# Altium PCB Sonar.PcbDoc
Units mm, origin at the board's own origin, x right, y up, seen from the top; angles counter-clockwise.
Board outline 29.5 x 29.5 mm, 4 copper layers (Top Layer, MidLayer1, GroundPlane, Bottom Layer); 16 components, 18 nets, 106 pads, 20 vias.
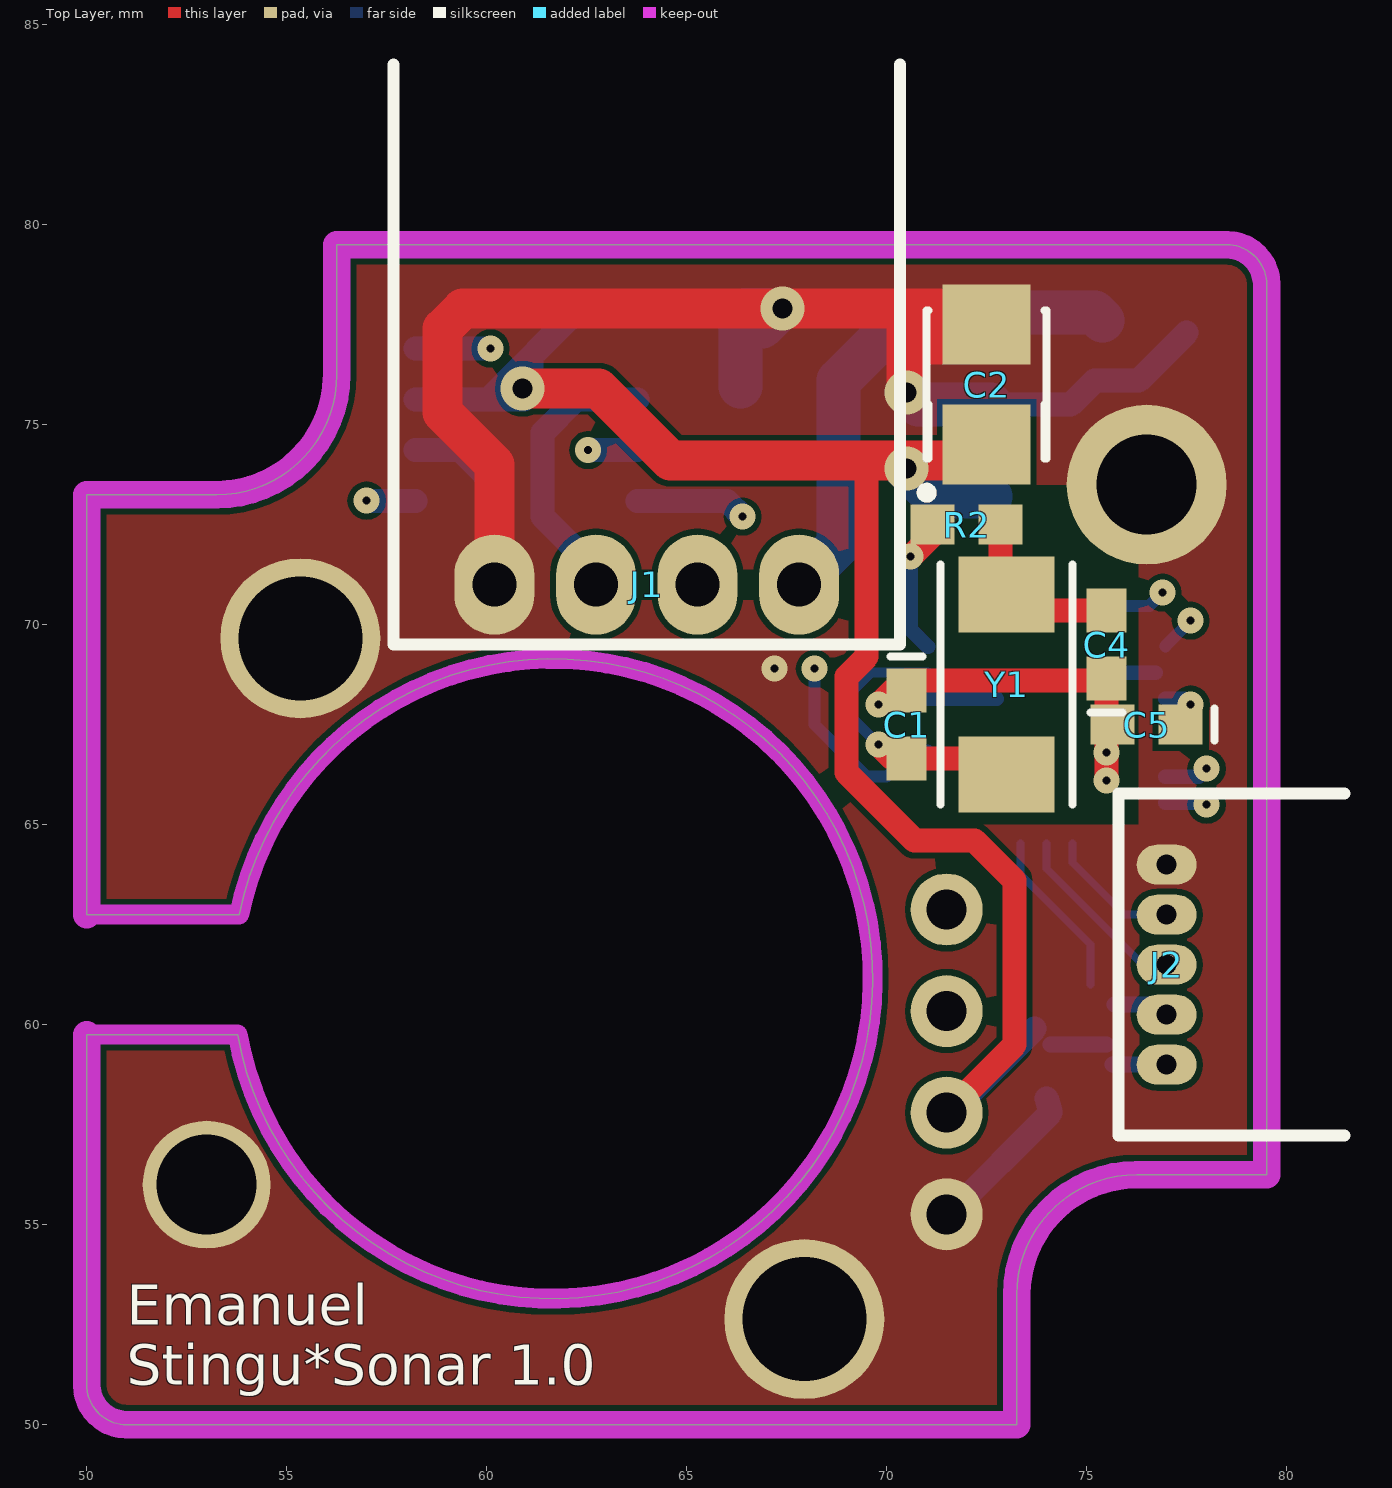
[diagram p0: Top Layer view]
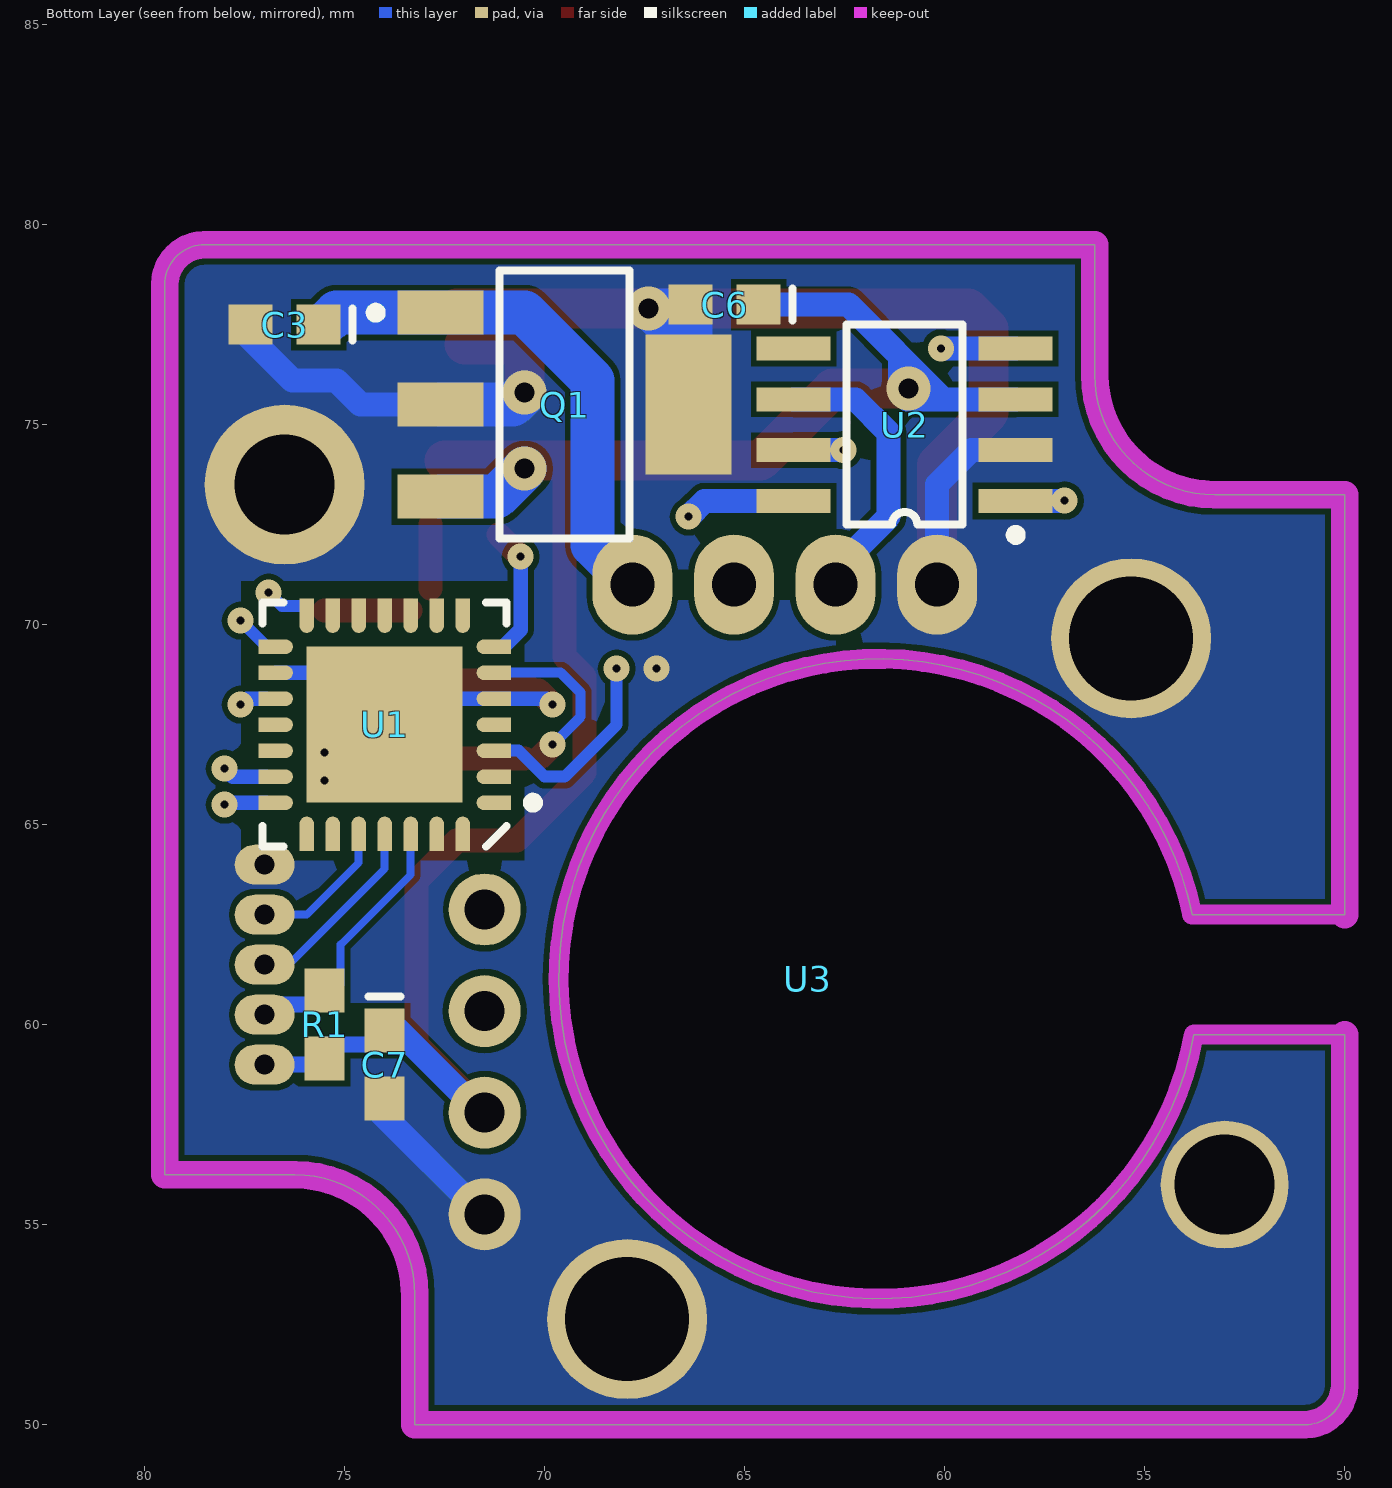
[diagram p1: Bottom Layer view, seen from below]
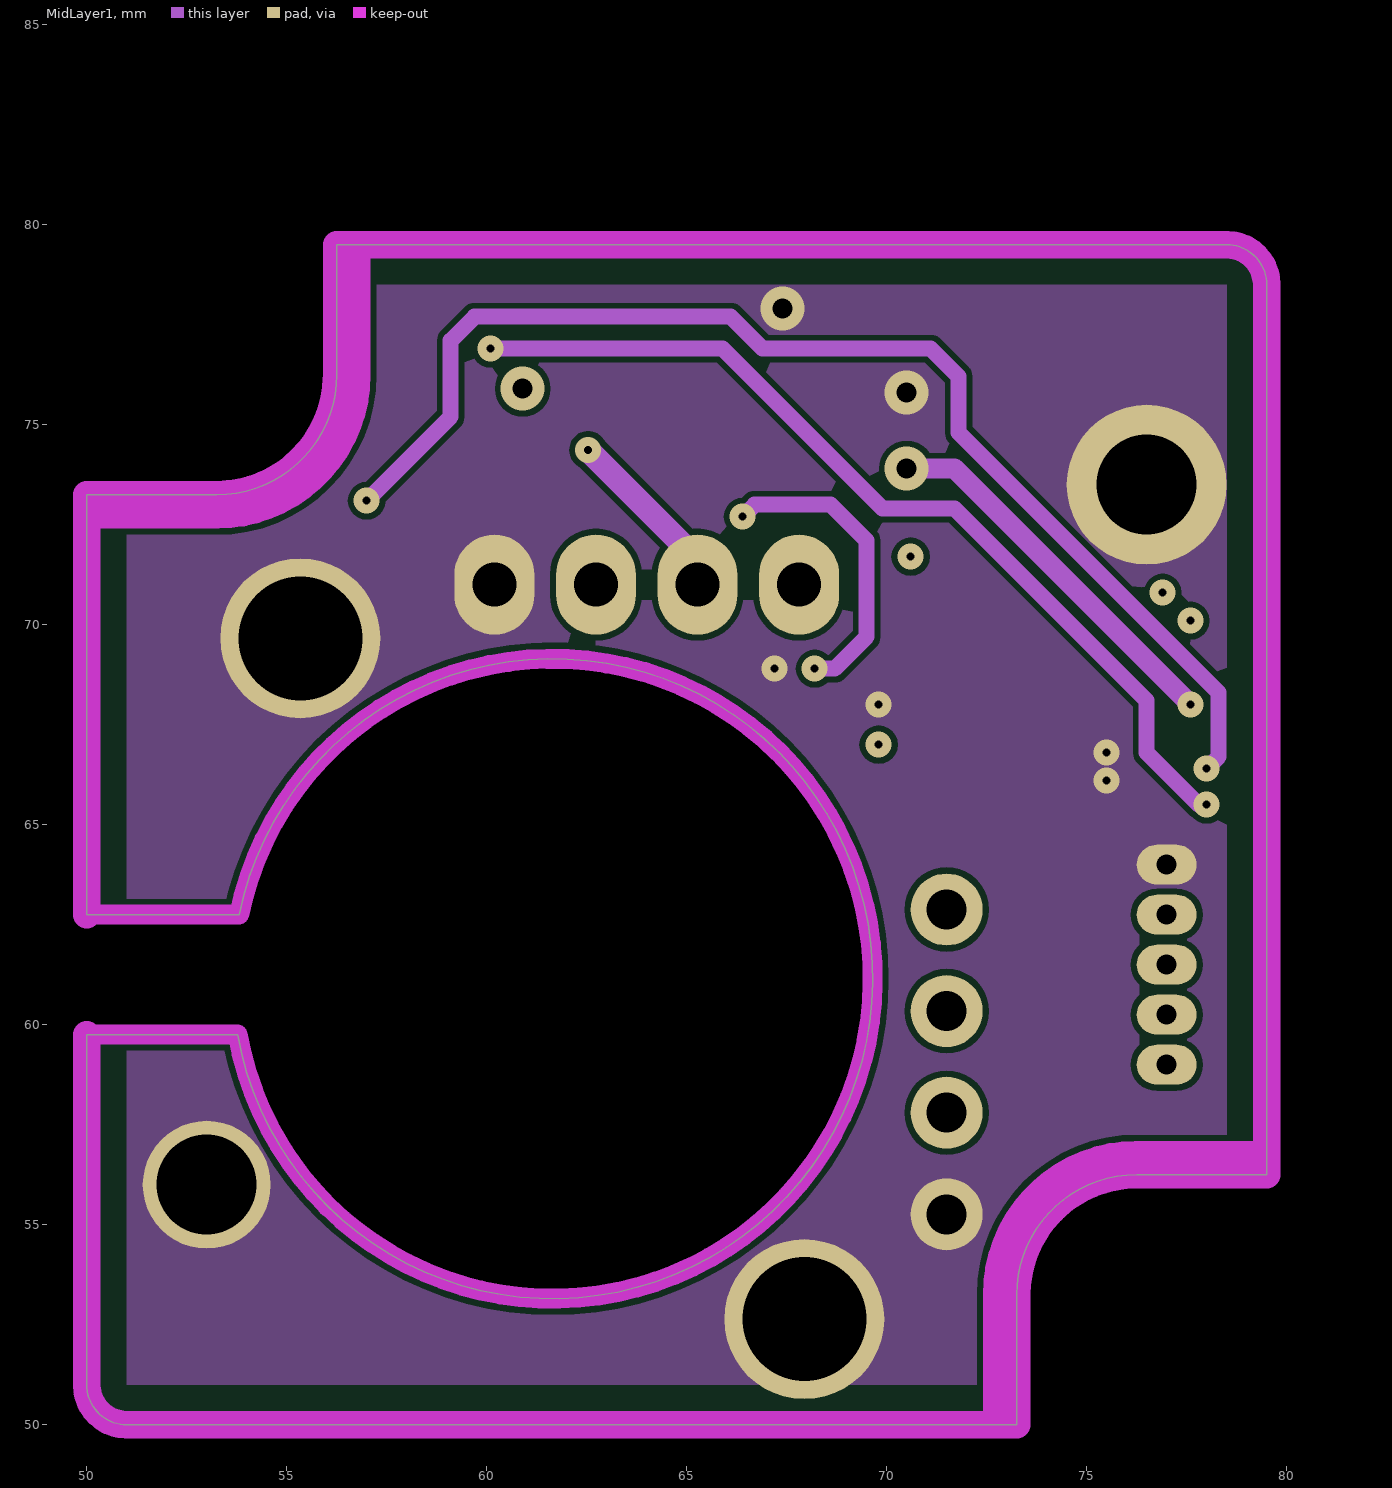
[diagram p2: MidLayer1]
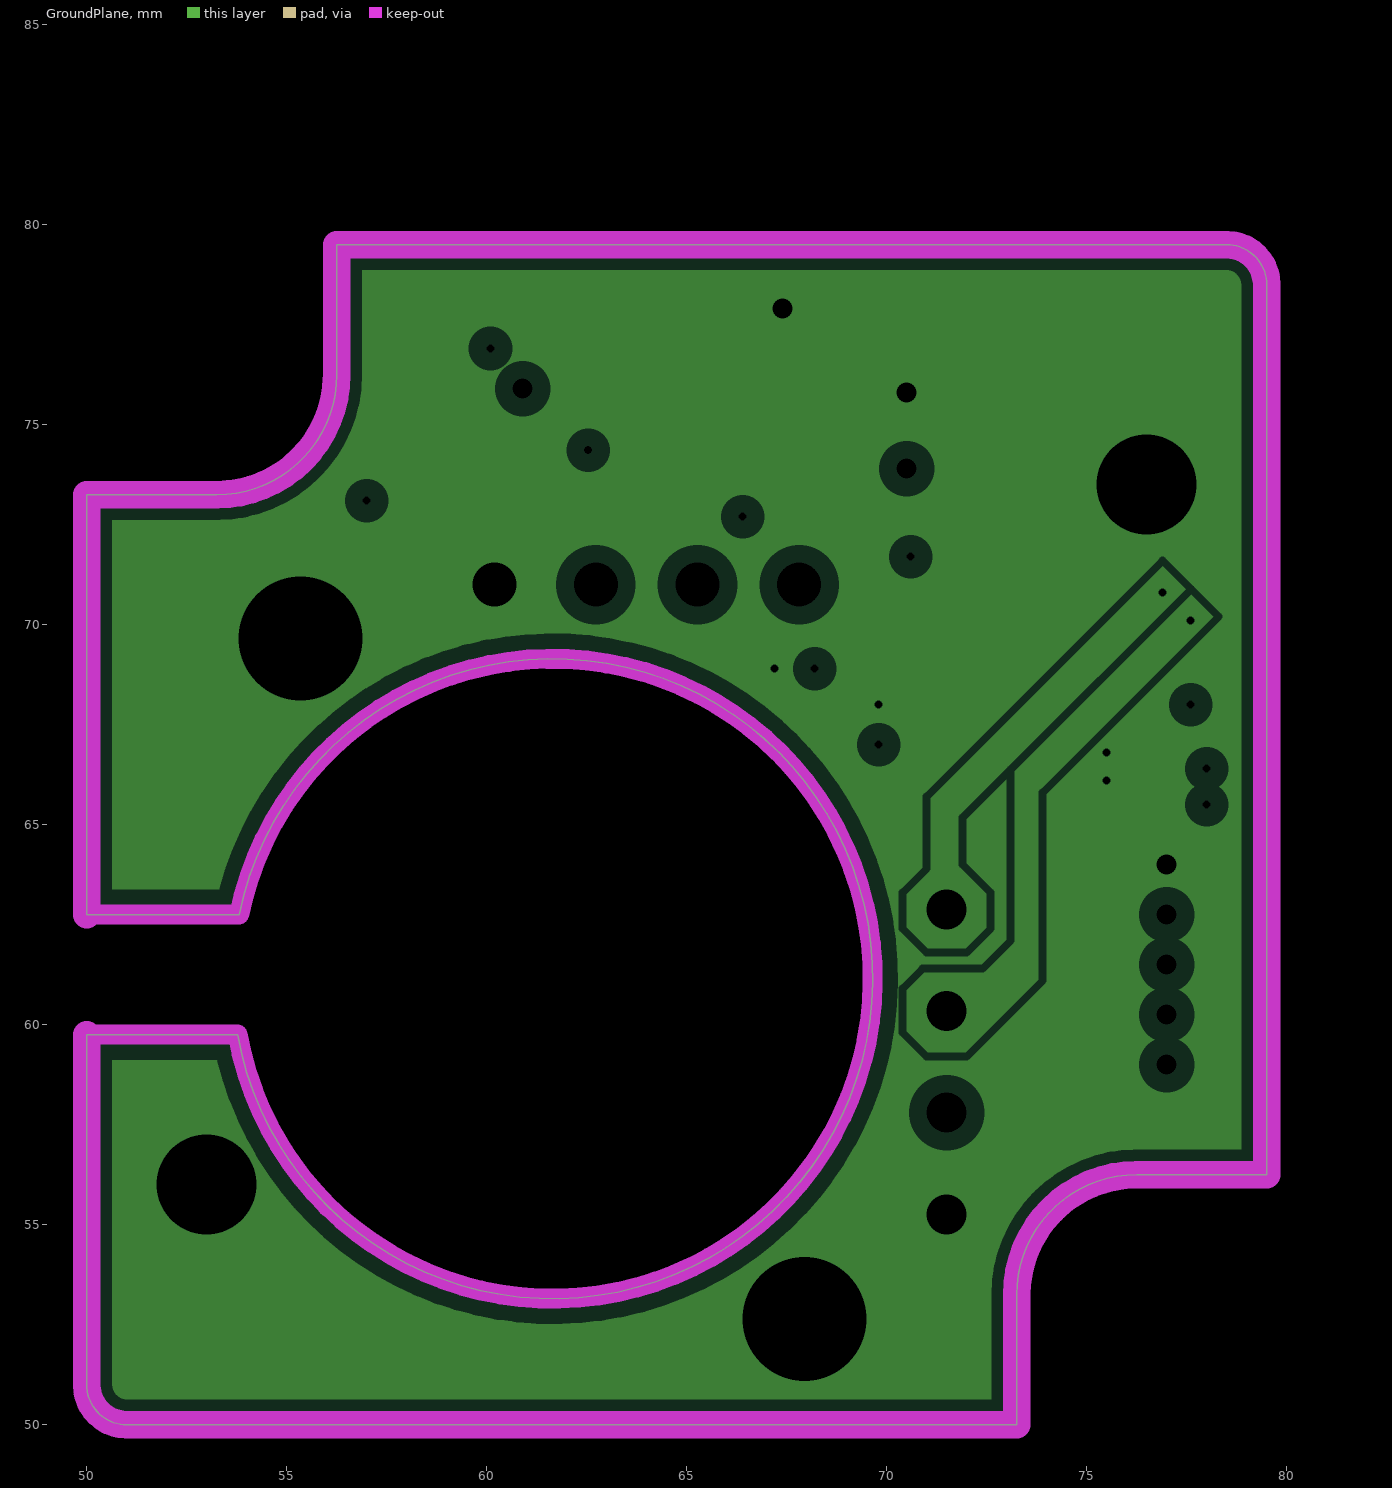
[diagram p3: GroundPlane, clearances drawn from the general rule]

## Layer stack, top to bottom
Top Layer: signal copper 0.036
Dielectric: prepreg 0.32, FR-4, Dk 4.8
MidLayer1: signal copper 0.036
Dielectric: core 0.32, FR-4, Dk 4.8
GroundPlane: plane copper 0.036, net GND
Dielectric: prepreg 0.32, FR-4, Dk 4.8
Bottom Layer: signal copper 0.036

## Board outline
51,50 cw(c51,51) 50,51 50,59.75 53.773,59.75 ccw(c61.65,61.15) 53.812,62.752 53.812,62.75 50,62.75 50,73.25 53.25,73.25 ccw(c53.25,76.25) 56.25,76.25 56.25,79.5 78.5,79.5 cw(c78.5,78.5) 79.5,78.5 79.5,56.25 76.25,56.25 ccw(c76.25,53.25) 73.25,53.25 73.25,50

## Design rules (kind name [scope] priority, off if disabled: settings)
Clearance [All] p1: gap=0.152
ComponentClearance [All] p1 off: gap=0.254 collisioncheckmode=3 verticalgap=0.254
HoleSize [All] p1: absolutevalues=TRUE maxlimit=4 minlimit=0.2 maxpercent=80.000 minpercent=20.000
PlaneClearance [All] p1: clearance=0.445
PlaneConnect [All] p1: planeconnectstyle=Direct reliefexpansion=0.508 reliefentries=4 reliefconductorwidth=0.254 reliefairgap=0.254
PolygonConnect [All] p1: connectstyle=Direct reliefconductorwidth=0.254 reliefentries=4 polygonreliefangle="90 Angle"
RoutingVias [All] p1: holewidth=0.2 width=0.65 viastyle="Through Hole" minholewidth=0.2 minwidth=0.65 maxholewidth=1.5 maxwidth=2.1
ShortCircuit ShortCircuit_Unconnected_Pins [IsPad and not InnetClass('All') vs IsPad and not InnetClass('All')] p1: allowed=TRUE
ShortCircuit [All] p2: allowed=FALSE
SolderMaskExpansion [All] p1: expansion=0.075
TestPointUsage [All] p1: valid=0 allowmultiple=FALSE
Testpoint [All] p1: side=15 testpointundercomponent=TRUE minsize=1.016 maxsize=2.54 preferedsize=1.524 minholesize=0 maxholesize=1.016 preferedholesize=0.813 testpointgrid=0.025 style=1023 order=0123456789
Width [All] p1: maxlimit=3 minlimit=0.152 preferedwidth=0.3 minimp=50.000000 maximp=50.000000 favimp=50.000000
14 further rules are at their usual default settings.

## Components (designator, comment, footprint, x,y, rotation, side; value= is the part's Value field where it differs from the comment)
C1 "Cap" CC1608-0603 70.5,67.5 r270 top
C2 "TPSB106K016R0800" TC3528-1411 72.5,76 r90 top
C3 "UMK107BJ104KA-T" CC1608-0603 76.5,77.5 r0 bottom
C4 "Cap" CC1608-0603 75.5,69.5 r90 top
C5 "UMK107BJ104KA-T" CC1608-0603 76.5,67.5 r180 top
C6 "UMK107BJ104KA-T" CC1608-0603 65.5,78 r0 bottom
C7 "UMK107BJ104KA-T" CC1608-0603 74,59 r270 bottom
J1 "70553-0003" CON_CAN_Device-4 64,71 r180 top
J2 "53048-0510" CON_ISP_H 77,61.5 r90 top
Q1 "MIC5201-5.0YS" DSO-G3 69.5,75.5 r270 bottom
R1 "Res" CR1608-0603 75.5,60 r270 bottom
R2 "Res" CR1608-0603 72,72.5 r0 top
U1 "PIC18F2580-I/ML" QFN6X6-28 74,67.5 r90 bottom
U2 "TJA1040TD-T" SO-G8/E2.9 61,75 r90 bottom
U3 "LV-MaxSonar-LX1" MAXSONAR 71.5,70.5 r90 bottom
Y1 "CS10-16.000MABJ-UT" CS10 73,68.5 r90 top

## Footprints (in the part's own frame and the unit in brackets; to place one, negate y for a bottom-side part, rotate by r counter-clockwise, add the part's x,y. Pads: shape width x height; smd on the part's side, far side on the other; paste and mask are expansions set on the pad)
CC1608-0603 [mm] "Chip Capacitor; Body 1.6 x 0.8 mm (LxW typ)"
  rect 1.1x1 smd: 1(-0.85,0) 2(0.85,0)
  silkscreen extent -1.7,-0.4 -1.7,0.4
CON_CAN_Device-4 [mm] "4-pin CAN connector - device side"
  oval 2x2.5 hole 1.1: 1(-3.81,0) 2(-1.27,0) 3(1.27,0) 4(3.81,0)
  silkscreen extent -6.33,-13 6.33,1.5
CON_ISP_H [mm] "Microchip ISP Connector horizontal"
  oval 1x1.5 hole 0.5: 1(-2.5,0) 2(-1.25,0) 3(0,0) 4(1.25,0) 5(2.5,0)
  silkscreen extent -4.28,-4.45 4.28,1.2
CR1608-0603 [mm] "Chip Resistor; Body 1.6 x 0.8 mm (LxW typ)"
  rect 1.1x1 smd: 1(-0.85,0) 2(0.85,0)
CS10 [mm] "Crystal"
  rect 1.9x2.4 smd: 1(-2.25,0) 2(2.25,0)
  silkscreen extent -3,-1.65 3,1.65
DSO-G3 [mm] "SOT-223/SC-73; 4 Leads; Body 6.7 x 7.3 mm, inc. leads (LxW max)"
  rect 1.1x2.15 smd: 1(-2.3,-3.1) 2(0,-3.1) 3(2.3,-3.1)
  rect 3.5x2.15 smd: 4(0,3.1)
  silkscreen extent -3.35,-4.85 3.35,1.63
MAXSONAR [mm] "MaxSonar Module"
  round 4 hole 3.1: 0(-17.86,-3.56) 0(-0.84,-16.16)
  round 1.8 hole 1: 4(-7.62,0) 5(-10.16,0) 6(-12.7,0) 7(-15.24,0)
QFN6X6-28 [mm] "Quad Flat No Lead, Plastic, Punch; 28 Terminals; Body 6 x 6 mm; Pitch 0.65 mm"
  rect 0.37x0.37 smd: 1(-1.95,-2.97) 2(-1.3,-2.97) 3(-0.65,-2.97) 4(0,-2.97) 5(0.65,-2.97) 6(1.3,-2.97) 7(1.95,-2.97) 8(2.97,-1.95) 9(2.97,-1.3) 10(2.97,-0.65) 11(2.97,0) 12(2.97,0.65) 13(2.97,1.3) 14(2.97,1.95) 15(1.95,2.97) 16(1.3,2.97) 17(0.65,2.97) 18(0,2.97) 19(-0.65,2.97) 20(-1.3,2.97) 21(-1.95,2.97) 22(-2.97,1.95) 23(-2.97,1.3) 24(-2.97,0.65) 25(-2.97,0) 26(-2.97,-0.65) 27(-2.97,-1.3) 28(-2.97,-1.95)
  oval 0.37x0.86 smd: 1(-1.95,-2.725) 2(-1.3,-2.725) 3(-0.65,-2.725) 4(0,-2.725) 5(0.65,-2.725) 6(1.3,-2.725) 7(1.95,-2.725) 15(1.95,2.725) 16(1.3,2.725) 17(0.65,2.725) 18(0,2.725) 19(-0.65,2.725) 20(-1.3,2.725) 21(-1.95,2.725)
  oval 0.86x0.37 smd: 8(2.725,-1.95) 9(2.725,-1.3) 10(2.725,-0.65) 11(2.725,0) 12(2.725,0.65) 13(2.725,1.3) 14(2.725,1.95) 22(-2.725,1.95) 23(-2.725,1.3) 24(-2.725,0.65) 25(-2.725,0) 26(-2.725,-0.65) 27(-2.725,-1.3) 28(-2.725,-1.95)
  rect 3.9x3.9 smd: 29(0,0)
  silkscreen extent -3.05,-3.83 3.05,3.05
SO-G8/E2.9 [mm] "Small Outline; 8 Leads; Body Width 3.9 mm; Pitch 1.27 mm"
  rect 0.6x1.85 smd: 1(-1.905,-2.775) 2(-0.635,-2.775) 3(0.635,-2.775) 4(1.905,-2.775) 5(1.905,2.775) 6(0.635,2.775) 7(-0.635,2.775) 8(-1.905,2.775)
  silkscreen extent -2.88,-2.9 2.5,1.45
TC3528-1411 [mm] "Capacitor, SM Tantalum; Body 3.5 x 2.8 mm (LxW typ)"
  rect 2x2.2 smd: 1(-1.5,0) 2(1.5,0)
  silkscreen extent -2.82,-1.5 1.85,1.62

## Part data
C1 C4: "Capacitor"
C2: library part "Cap Pol", "Polarized Capacitor (Surface Mount)"
C3 C5 C6 C7: library part Cap, "Capacitor"
J1: library part CON_CAN_DEVICE, "4 pin CAN Connector 2.54mm pitch"
J2: library part CON_ISP_Header_5p_1.25mm_horizontal, "6 pin header - 1.25mm pitch horizontal"
Q1: "5V LDO 200mA"
R1 R2: "Resistor"
U1: "8 bit CAN MCU"
U2: "5V CAN Transceiver"
U3: library part MaxSonar_LX1, "Maxbotix ultrasound range sensor"
Y1: library part CS10, "Crystal Oscillator"

## Free pads (board coordinates)
  round 3.2 hole 2.5: 0(53,56)
  round 4 hole 2.5: 0(76.5,73.5)

## Via types
v1: diameter 0.65, hole 0.2, Top Layer to Bottom Layer, tented both sides, 11 vias
v2: diameter 1.1, hole 0.5, Top Layer to Bottom Layer, 3 vias
v3: diameter 0.65, hole 0.2, Top Layer to Bottom Layer, tented bottom, 3 vias
v4: diameter 1.1, hole 0.5, Top Layer to Bottom Layer, tented both sides, 1 vias
v5: diameter 0.65, hole 0.2, Top Layer to Bottom Layer, 1 vias
v6: diameter 0.65, hole 0.2, Top Layer to Bottom Layer, tented top, 1 vias

## Nets (pads, with @x,y where several pads share a name; then routed paths per layer and width w, separated by ;. In a path a pad name is that pad's centre, name@x,y a point inside that pad or via, vN(x,y) a via of type N, cw(c..) or ccw(c..) an arc to the next point about the centre after c; other vN are vias at no path point)
C\A\N\_\E\N\: U1.3 U2.8 | length 15.5
  MidLayer1 w0.4: v1(66.4,72.7) 66.7,73 68.6,73 69.5,72.1 69.5,69.7 68.7,68.9 v1(68.2,68.9)
  Bottom Layer w0.3: v1(68.2,68.9) 68.2,67.5 69.5,66.2 70,66.2 70.65,66.85 U1.3@71.03,66.85
  Bottom Layer w0.6: U2.8 66.005,73.095 v1(66.4,72.7)
CAN_RX: U1.21 U2.4 | length 26.3
  MidLayer1 w0.4: v1(60.095,76.905) 65.895,76.905 69.9,72.9 71.7,72.9 76.5,68.1 76.5,66.8 77.8,65.5 v1(78,65.5)
  Bottom Layer w0.37: U1.21@76.97,65.55 77.85,65.55 v1(78,65.5)
  Bottom Layer w0.6: U2.4 v1(60.095,76.905)
CAN_TX: U1.20 U2.1 | length 33.4
  MidLayer1 w0.4: v1(57,73.1) 59.1,75.2 59.1,77.1 59.7,77.7 66.1,77.7 66.9,76.9 71.1,76.9 71.8,76.2 71.8,74.8 78.3,68.3 78.3,66.7 v1(78,66.4)
  Bottom Layer w0.37: U1.20@76.97,66.2 77.8,66.2 v1(78,66.4)
  Bottom Layer w0.6: v1@57.005,73.095 U2.1
GND: C1.1 C2.2 C3.2 C4.1 C5.2 C6.2 C7.2 J1.4 J2.5 pad.0 Q1.2 Q1.4 U1.5 U1.16 U1.29 U2.2 U3.0 U3.7 | length 56.3
  Top Layer w0.6: v3(69.8,68) C1.1@70.15,68.35 ; C1.1@70.5,68.6 C4.1@75.45,68.6 ; v6(75.5,66.1) v5(75.5,66.8) 75.5,67.6 C4.1
  Top Layer w1: J1.4 60.19,74.01 58.9,75.3 58.9,77.4 59.4,77.9 v2(67.4,77.9) C2.2@72.2,77.9 ; v2(70.5,75.8) 70.5,77.8 ; 70.5,77 C2.2@72,77
  Bottom Layer w0.37: v3(69.8,68) 69.95,68.15 71.275,68.15 U1.29@72.75,68.15 ; U1.29@75.4,68.8 U1.16@76.725,68.8
  Bottom Layer w0.6: U2.2 59.335,74.365 60.19,73.51 J1.4 ; U3.7@71.56,55.26 74.1,57.8 C7.2 ; Q1.2 74.6,75.5 75.2,76.1 76.3,76.1 C3.2@77.5,77.3
  Bottom Layer w1: C6.2@66.45,77.9 v2(67.4,77.9) 66.9,77.4
  Bottom Layer w1.1: Q1.4@66.35,75.95 C6.2@66.35,77.7 ; v2(70.5,75.8) 70.8,75.5 Q1.2
  other v1: 67.2,68.9
LED_GREEN: U1.22
LED_RED: U1.23
M\C\L\R\: J2.2 R1.1 U1.26 | length 5.6
  Bottom Layer w0.2: U1.26@73.35,64.53 73.35,63.75 75.1,62 R1.1@75.1,61
  Bottom Layer w0.4: R1.1@75.7,60.5 J2.2@77,60.5
NetC1_2: C1.2 U1.6 Y1.1 | length 6.2
  Top Layer w0.6: v3(69.8,67) C1.2@70.15,66.65 ; C1.2 Y1.1@72.45,66.65
  Bottom Layer w0.25: v3(69.8,67) 69.1,67.7 69.1,68.3 69.6,68.8 U1.6@71.03,68.8
NetC3_1: C3.1 J1.1 Q1.1 | length 12.9
  Bottom Layer w1.1: J1.1 68.8,71.99 68.8,76.1 70.5,77.8 75.2,77.8 C3.1@75.4,77.6
NetC4_2: C4.2 R2.2 Y1.2 | length 3.8
  Top Layer w0.6: Y1.2@72.85,70.9 R2.2 ; Y1.2@73.35,70.35 C4.2
NetJ1_2: J1.2 U2.7 | length 5.7
  MidLayer1 w0.6: v1(62.535,74.365) 65.27,71.63 J1.2
  Bottom Layer w0.6: v1(62.535,74.365) U2.7
NetJ1_3: J1.3 U2.6 | length 6.7
  Bottom Layer w0.6: J1.3@62.7,71.4 61.4,72.7 61.4,74.8 62.235,75.635 U2.6
NetR2_1: R2.1 U1.7 | length 3.2
  Top Layer w0.6: v1(70.6,71.7) R2.1@71.15,72.25
  Bottom Layer w0.37: v1(70.6,71.7) 70.6,69.88 U1.7@71.03,69.45
NetU1_14: U1.14 U3.4 | length 1.1
  Bottom Layer w0.3: U1.14@75.95,70.47 76.57,70.47 v1(76.9,70.8)
NetU1_15: U1.15 U3.5 | length 0.9
  Bottom Layer w0.3: U1.15@76.97,69.45 76.97,69.47 v1(77.6,70.1)
PGC: J2.4 U1.24 | length 3.4
  Bottom Layer w0.2: U1.24@74.65,64.53 74.65,64.05 75.95,62.75 J2.4
PGD: J2.3 U1.25 | length 4
  Bottom Layer w0.2: U1.25@74,64.53 74,63.9 J2.3@76.4,61.5
VCC5V: C2.1 C5.1 C6.1 C7.1 J2.1 Q1.3 R1.2 U1.17 U2.3 U3.6 | length 60
  Top Layer w0.6: 69.5,74.1 69.5,69.2 69,68.7 69,66.3 70.7,64.6 72.2,64.6 73.2,63.6 73.2,59.5 U3.6
  Top Layer w1: v4(60.9,75.9) 62.8,75.9 64.6,74.1 C2.1@72.5,74.1 ; v2(70.5,73.9) v2@70.7,74.1
  MidLayer1 w0.5: v2(70.5,73.9) 71.7,73.9 v3(77.6,68)
  Bottom Layer w0.37: U1.17@76.97,68.15 77.45,68.15 v3(77.6,68)
  Bottom Layer w0.4: C7.1@74.1,59.5 R1.2@75.5,59.5 ; R1.2@75.65,59 J2.1
  Bottom Layer w0.6: U2.3 60.035,75.635 ; v4@60.935,75.635 60.035,75.635 ; v4@61.117,75.883 61.117,76.717 ; C6.1 62.4,78 60.035,75.635 ; U3.6 71.6,57.8 C7.1@73.7,59.9
  Bottom Layer w1.1: v2(70.5,73.9) 71.2,73.2 Q1.3
pads on no net: U1.1 U1.2 U1.4 U1.8 U1.9 U1.10 U1.11 U1.12 U1.13 U1.18 U1.19 U1.27 U1.28 U2.5

## Polygon pours and split planes (outlines as drawn)
GND on Top Layer "Top Layer-GND 1" (solid, remove dead copper, pour order 1001): 50,60.005 50,50 72.9,50 72.9,53.4 75.75,56.25 79.5,56.25 79.5,65 70,65 69,66 69,68.6 69.4,69 69.4,73.5 79.5,73.5 79.5,79 79,79.5 56.5,79.5 56.5,75.1 54.6,73.2 50,73.2
GND on Top Layer "Top Layer-GND" (solid, remove dead copper, pour order 1000): 79.5,74.1 76.3,74.1 76.3,64.5 79.5,64.5
GND on MidLayer1 "MidLayer1-GND" (solid, remove dead copper, pour order 1002): 78.5,78.5 78.5,56.5 75,56.5 73,54.5 73,51 51,51 51,73 54.5,73 56.5,75 56.5,78.5
GND on Bottom Layer "Bottom Layer-GND" (solid, remove dead copper, pour order 1003): 56.3,79.4 78.8,79.4 79.5,78.7 79.5,71.1 70.5,71.1 70.5,64.1 79.5,64.1 79.5,56.3 75,56.3 73.1,54.4 73.1,50 50.8,50 49.9,50.9 49.9,73.2 54,73.2 54.9,74.1 56.3,75.5
GND on Bottom Layer "Bottom Layer-GND 1" (solid, remove dead copper, pour order 1004): 79.5,72 77.6,72 77.6,63.7 79.5,63.7
GND on GroundPlane (split plane): 78.637,78.832 78.754,78.754 78.832,78.637 78.856,78.517 78.853,78.5 78.853,56.897 76.25,56.897 76.24,56.895 75.68,56.851 75.123,56.718 74.595,56.499 74.107,56.2 73.672,55.828 73.3,55.393 73.001,54.905 72.782,54.377 72.649,53.82 72.605,53.26 72.603,53.25 72.603,50.647 51,50.647 50.983,50.644 50.863,50.668 50.746,50.746 50.668,50.863 50.644,50.983 50.647,51 50.647,59.103 53.261,59.103 53.377,58.64 53.663,57.842 54.025,57.075 54.462,56.347 54.967,55.665 55.537,55.037 56.165,54.467 56.847,53.962 57.575,53.525 58.342,53.163 59.14,52.877 59.963,52.671 60.803,52.546 61.65,52.505 62.497,52.546 63.337,52.671 64.16,52.877 64.958,53.163 65.725,53.525 66.453,53.962 67.135,54.467 67.763,55.037 68.333,55.665 68.838,56.347 69.275,57.075 69.637,57.842 69.923,58.64 70.129,59.463 70.254,60.303 70.295,61.15 70.254,61.997 70.129,62.837 69.923,63.66 69.637,64.458 69.275,65.225 68.838,65.953 68.333,66.635 67.763,67.263 67.135,67.833 66.453,68.338 65.725,68.775 64.958,69.137 64.16,69.423 63.337,69.629 62.497,69.754 61.65,69.795 60.803,69.754 59.963,69.629 59.14,69.423 58.342,69.137 57.575,68.775 56.847,68.338 56.165,67.833 55.537,67.263 54.967,66.635 54.462,65.953 54.025,65.225 53.663,64.458 53.377,63.66 53.311,63.397 50.647,63.397 50.647,72.603 53.25,72.603 53.26,72.605 53.82,72.649 54.377,72.782 54.905,73.001 55.393,73.3 55.828,73.672 56.2,74.107 56.499,74.595 56.718,75.123 56.851,75.68 56.895,76.24 56.897,76.25 56.897,78.853 78.5,78.853 78.517,78.856
NetU1_15 on GroundPlane (split plane): 78.147,70.2 73.823,65.877 73.792,65.8 73.792,61.145 71.955,59.308 71.045,59.308 70.508,59.845 70.508,60.855 70.945,61.292 72.4,61.292 72.477,61.323 73.177,62.023 73.186,62.046 73.208,62.1 73.208,66.333 77.611,70.736
NetU1_14 on GroundPlane (split plane): 77.458,70.889 73.023,66.455 71.823,65.255 71.792,65.178 71.792,64 71.823,63.923 72.492,63.255 72.492,62.445 71.955,61.908 71.045,61.908 70.508,62.445 70.508,63.255 71.077,63.823 71.108,63.9 71.108,65.655 76.9,71.447

## Keep-outs
MidLayer1:
  lines w0.696: 50,72.75 53.25,72.75 ccw(c53.25,76.25) 56.75,76.25 56.75,79.5 ; 72.75,50 72.75,53.25 cw(c76.25,53.25) 76.25,56.75 79.5,56.75
Keep-Out Layer:
  lines w0.5: 50,59.75 53.773,59.75 ccw(c61.65,61.15) 53.812,62.752 ; 50,62.75 53.812,62.75
  lines w0.696: 50,59.75 50,51 ccw(c51,51) 51,50 73.25,50 73.25,53.25 cw(c76.25,53.25) 76.25,56.25 79.5,56.25 79.5,78.5 ccw(c78.5,78.5) 78.5,79.5 56.25,79.5 56.25,76.25 cw(c53.25,76.25) 53.25,73.25 50,73.25 50,62.75

## Other copper
GroundPlane (plane layer: these items are gaps in the copper):
  lines w0.2: 77.611,70.889 73.1,66.378 ; 73.1,66.378 73.1,62.1 72.4,61.4 70.9,61.4 70.4,60.9 70.4,59.8 71,59.2 72,59.2 73.9,61.1 73.9,65.8 78.3,70.2 76.9,71.6 71,65.7 71,63.9 70.4,63.3 70.4,62.4 71,61.8 72,61.8 72.6,62.4 72.6,63.3 71.9,64 71.9,65.178 73.1,66.378

## Silkscreen, mask and mechanical layers (free items; w line width, h text height)
Top Overlay:
  text "Emanuel" at 51,52.5 h1
  text "Stingu*Sonar 1.0" at 51,51 h1
Top Solder:
  circle w1: c53,56 r1.5
Bottom Solder:
  circle w1: c53,56 r1.5
Mechanical 16:
  lines w0.2: 53.812,62.75 50,62.75 50,73.25 53.25,73.25 ccw(c53.25,76.25) 56.25,76.25 56.25,79.5 78.5,79.5 cw(c78.5,78.5) 79.5,78.5 79.5,56.25 76.25,56.25 ccw(c76.25,53.25) 73.25,53.25 73.25,50 51,50 cw(c51,51) 50,51 50,59.75 53.773,59.75 ccw(c61.65,61.15) 53.812,62.752